# Altium PCB LPC-LINK-2_SHIELD.PcbDoc
Units mil, origin at the board's own origin, x right, y up, seen from the top; angles counter-clockwise.
Board outline 3320 x 1470 mil, 2 copper layers (Top Layer, Bottom Layer), stack 62.8 mil thick; 3 components, 34 nets, 124 pads, 0 vias.
Unrouted connection lines stored in the file: 24.
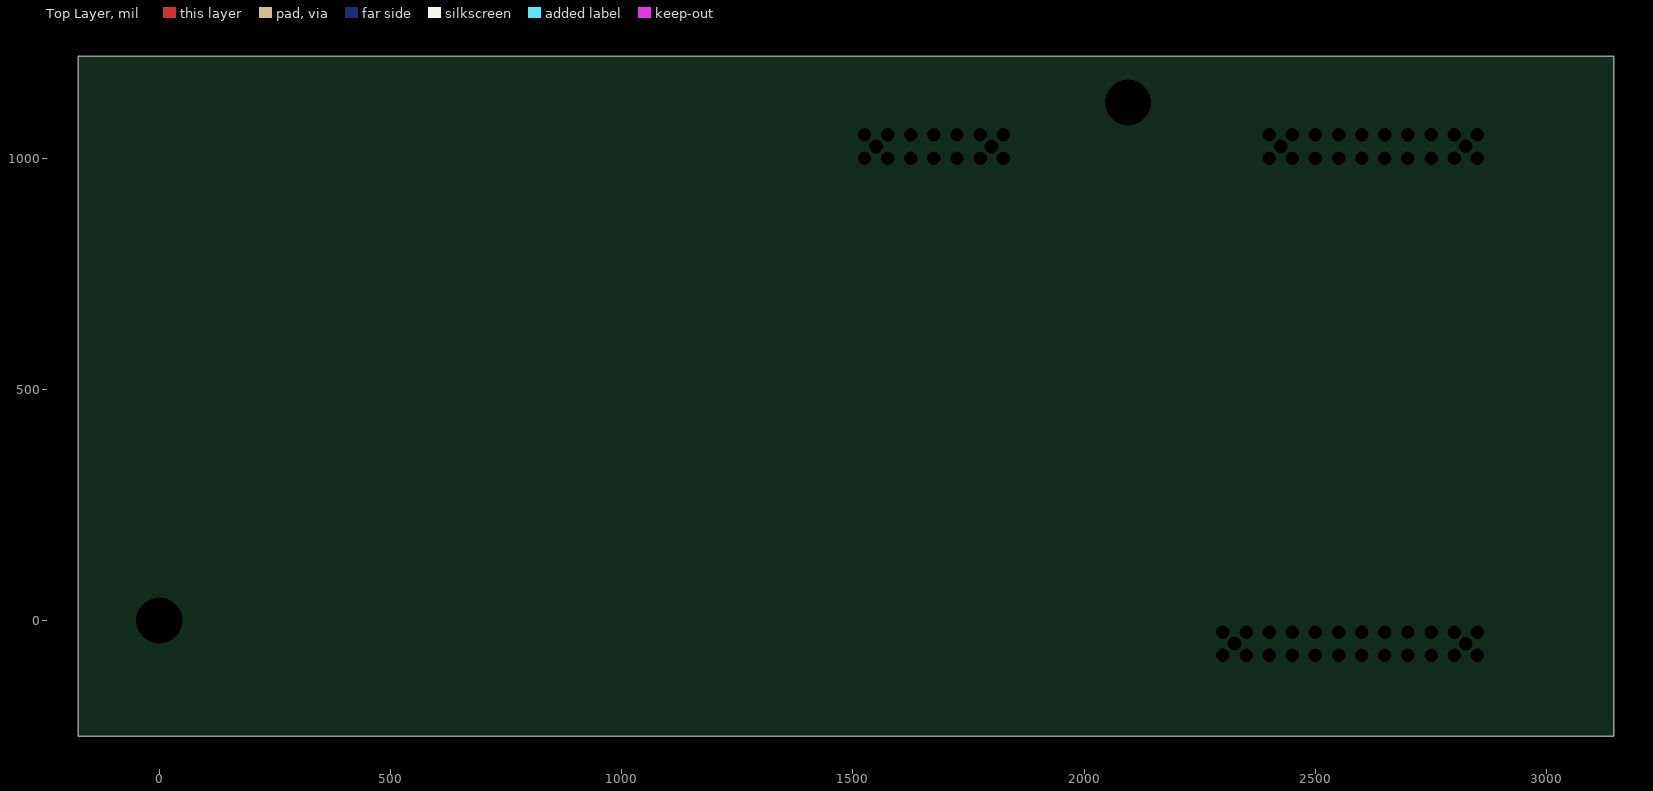
[diagram p0: Top Layer view]
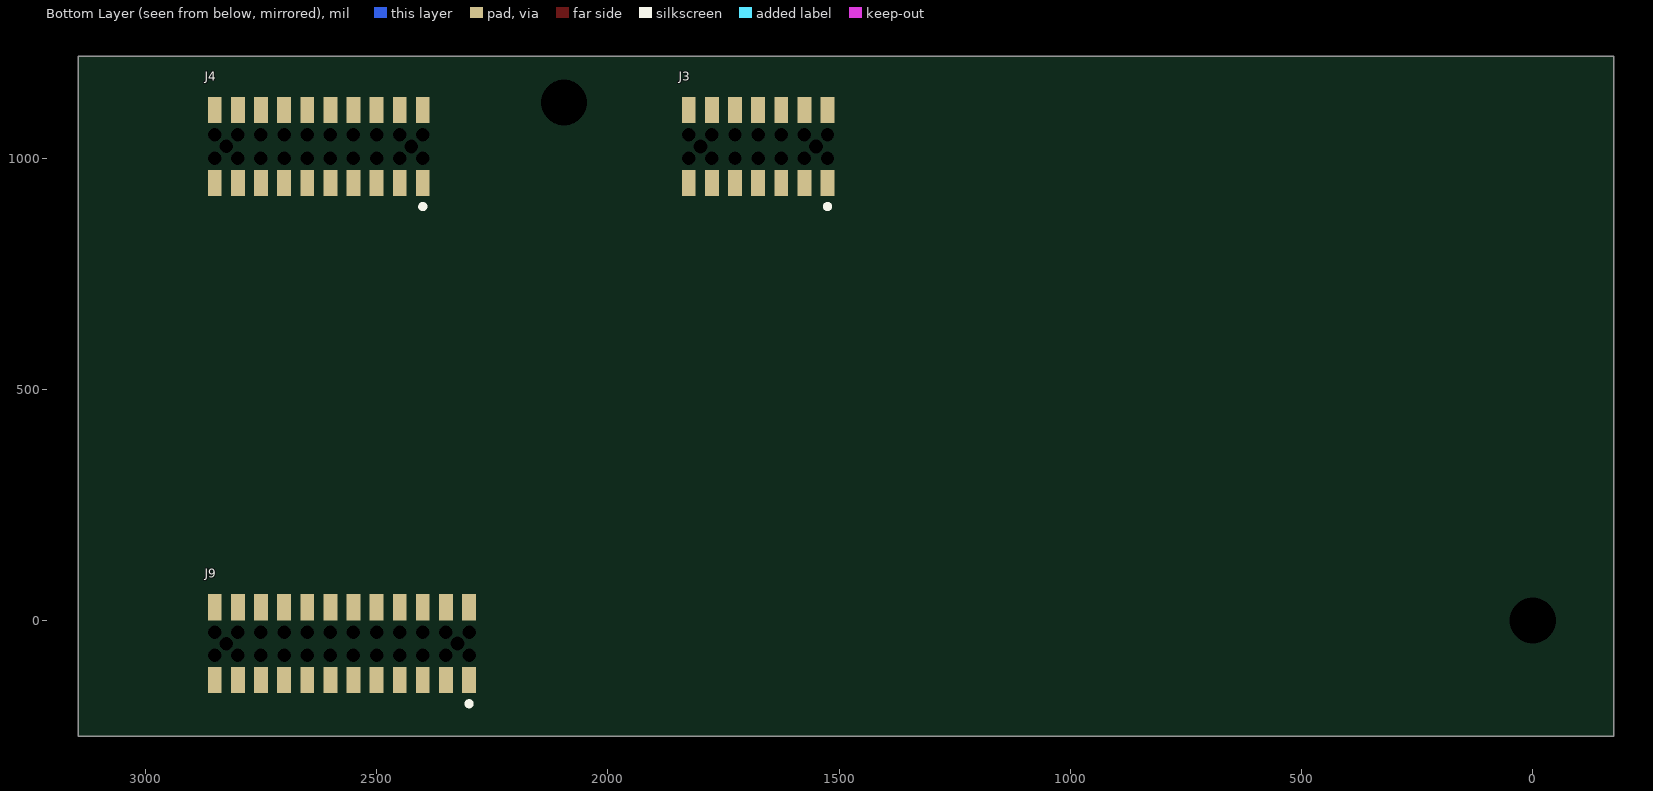
[diagram p1: Bottom Layer view, seen from below]

## Layer stack, top to bottom
Top Solder: solder mask 0.4, Solder Resist, Dk 3.5
Top Layer: signal copper 1.4
Dielectric 1: dielectric 60, FR-4, Dk 4.8
Bottom Layer: signal copper 1.4
Bottom Solder: solder mask 0.4, Solder Resist, Dk 3.5

## Board outline
-175,-250 3145,-250 3145,1220 -175,1220

## Design rules (kind name [scope] priority, off if disabled: settings)
Clearance [All] p1: gap=10
PolygonConnect [All] p1: connectstyle=Relief reliefconductorwidth=10 reliefentries=4 polygonreliefangle="90 Angle" airgapwidth=10
RoutingVias [All] p1: holewidth=28 width=50 viastyle="Through Hole" minholewidth=28 minwidth=50 maxholewidth=28 maxwidth=50
SolderMaskExpansion [All] p1: expansion=4
UnpouredPolygon [All] p1: allowunpoured=FALSE
Width [All] p1: maxlimit=10 minlimit=10 preferedwidth=10
29 further rules are at their usual default settings.

## Components (designator, comment, footprint, x,y, rotation, side; value= is the part's Value field where it differs from the comment)
J3 "FLE-107-01-G-DV-A" FLE-107-01-G-DV-A 1675,1025 r0 bottom
J4 "FLE-110-01-G-DV-A" FLE-110-01-G-DV-A 2625,1025 r0 bottom locked
J9 "FLE-112-01-G-DV-A" FLE-112-01-G-DV-A 2575,-50 r0 bottom

## Footprints (in the part's own frame and the unit in brackets; to place one, negate y for a bottom-side part, rotate by r counter-clockwise, add the part's x,y. Pads: shape width x height; smd on the part's side, far side on the other; paste and mask are expansions set on the pad)
FLE-107-01-G-DV-A [mm]
  round 0.1 hole 0.74 unplated mask+0.381: 0(-3.81,-0.635) 0(-3.81,0.635) 0(-2.54,-0.635) 0(-2.54,0.635) 0(-1.27,-0.635) 0(-1.27,0.635) 0(0,-0.635) 0(0,0.635) 0(1.27,-0.635) 0(1.27,0.635) 0(2.54,-0.635) 0(2.54,0.635) 0(3.81,-0.635) 0(3.81,0.635)
  round 0.1 hole 0.762 unplated mask+0.381: 0(-3.175,0) 0(3.175,0)
  rect 0.76x1.435 smd: 1(-3.81,2) 2(-3.81,-2) 3(-2.54,2) 4(-2.54,-2) 5(-1.27,2) 6(-1.27,-2) 7(0,2) 8(0,-2) 9(1.27,2) 10(1.27,-2) 11(2.54,2) 12(2.54,-2) 13(3.81,2) 14(3.81,-2)
  silkscreen extent -3.94,3.18 -3.68,3.43, body extent -4.5,-2.31 4.5,2.29, height 4.56
FLE-110-01-G-DV-A [mm] "Socket"
  round 0.1 hole 0.74 unplated mask+0.381: 0(-5.715,-0.635) 0(-5.715,0.635) 0(-4.445,-0.635) 0(-4.445,0.635) 0(-3.175,-0.635) 0(-3.175,0.635) 0(-1.905,-0.635) 0(-1.905,0.635) 0(-0.635,-0.635) 0(-0.635,0.635) 0(0.635,-0.635) 0(0.635,0.635) 0(1.905,-0.635) 0(1.905,0.635) 0(3.175,-0.635) 0(3.175,0.635) 0(4.445,-0.635) 0(4.445,0.635) 0(5.08,0) 0(5.715,-0.635) 0(5.715,0.635)
  round 0.1 hole 0.762 unplated mask+0.381: 0(-5.08,0)
  rect 0.76x1.435 smd: 1(-5.715,2) 2(-5.715,-2) 3(-4.445,2) 4(-4.445,-2) 5(-3.175,2) 6(-3.175,-2) 7(-1.905,2) 8(-1.905,-2) 9(-0.635,2) 10(-0.635,-2) 11(0.635,2) 12(0.635,-2) 13(1.905,2) 14(1.905,-2) 15(3.175,2) 16(3.175,-2) 17(4.445,2) 18(4.445,-2) 19(5.715,2) 20(5.715,-2)
  silkscreen extent -5.84,3.18 -5.59,3.43, body extent -6.41,-2.29 6.41,2.31, height 4.56
FLE-112-01-G-DV-A [mm] "Socket"
  round 0.1 hole 0.74 unplated mask+0.381: 0(-6.985,-0.635) 0(-6.985,0.635) 0(-5.715,-0.635) 0(-5.715,0.635) 0(-4.445,-0.635) 0(-4.445,0.635) 0(-3.175,-0.635) 0(-3.175,0.635) 0(-1.905,-0.635) 0(-1.905,0.635) 0(-0.635,-0.635) 0(-0.635,0.635) 0(0.635,-0.635) 0(0.635,0.635) 0(1.905,-0.635) 0(1.905,0.635) 0(3.175,-0.635) 0(3.175,0.635) 0(4.445,-0.635) 0(4.445,0.635) 0(5.715,-0.635) 0(5.715,0.635) 0(6.35,0) 0(6.985,-0.635) 0(6.985,0.635)
  round 0.1 hole 0.762 unplated mask+0.381: 0(-6.35,0)
  rect 0.76x1.435 smd: 1(-6.985,2) 2(-6.985,-2) 3(-5.715,2) 4(-5.715,-2) 5(-4.445,2) 6(-4.445,-2) 7(-3.175,2) 8(-3.175,-2) 9(-1.905,2) 10(-1.905,-2) 11(-0.635,2) 12(-0.635,-2) 13(0.635,2) 14(0.635,-2) 15(1.905,2) 16(1.905,-2) 17(3.175,2) 18(3.175,-2) 19(4.445,2) 20(4.445,-2) 21(5.715,2) 22(5.715,-2) 23(6.985,2) 24(6.985,-2)
  silkscreen extent -7.11,3.18 -6.86,3.43, body extent -7.68,-2.29 7.68,2.31, height 4.56

## Part data
J3: "SAMTEC - FLE-107-01-G-DV-A - .050 MICRO STRIPS"
J4: "SAMTEC - FLE-110-01-G-DV-A - .050 MICRO STRIPS"
J9: "SAMTEC - FLE-112-01-G-DV-A - .050 MICRO STRIPS"

## Free pads (board coordinates)
  round 0 hole 100: 0(0,0) 0(2095,1120)

## Nets (pads, with @x,y where several pads share a name; then routed paths per layer and width w, separated by ;. In a path a pad name is that pad's centre, name@x,y a point inside that pad or via, vN(x,y) a via of type N, cw(c..) or ccw(c..) an arc to the next point about the centre after c; other vN are vias at no path point)
DIR_U3: J4.14
DIR_U4: J4.12
EXP_ADC0_DAC: J4.4
EXP_ADC1: J4.6
EXP_ADC2: J4.8
EXP_ADC3: J4.10
GND: J3.1 J4.1 J4.3 J4.5 J4.7 J4.9 J4.11 J4.13 J4.15 J4.17 J4.19 J9.1 J9.3 J9.5 J9.7 J9.9 J9.11 J9.13 J9.15 J9.17 J9.19 J9.21 J9.23
GPIO1_0: J9.4
GPIO1_1: J9.6
GPIO1_2: J9.8
GPIO1_3: J9.10
GPIO1_4: J9.12
GPIO1_12: J9.14
GPIO1_13: J9.16
GPIO3_0: J9.18
GPIO3_1: J9.20
GPIO3_2: J9.22
GPIO3_3: J9.24
GPIO3_5: J3.13
GPIO3_7: J3.14
GPIO5_8: J3.11
GPIO5_9: J3.12
I2C_SCL: J3.9
I2C_SDA: J3.10
SGPIO_9_BUF: J4.16
SGPIO_10_BUF: J4.18
SSP1_MISO: J3.5
SSP1_MOSI: J3.4
SSP1_SCK: J3.3
SSP1_SEL: J3.6
UART2_RXD: J3.7
UART2_TXD: J3.8
VDDA: J4.2
VIO_3V3: J3.2 J4.20 J9.2
pads on no net: J3.0 J4.0 J9.0

## Silkscreen, mask and mechanical layers (free items; w line width, h text height)
Mechanical 8:
  the board outline again, w5.51